# Altium PCB PCB.PcbDoc (part 2 of 2)
Units mm, origin at the board's own origin, x right, y up, seen from the top; angles counter-clockwise.
Board outline 75 x 95 mm, 2 copper layers (Top Layer, Bottom Layer); 84 components, 62 nets, 346 pads, 109 vias.
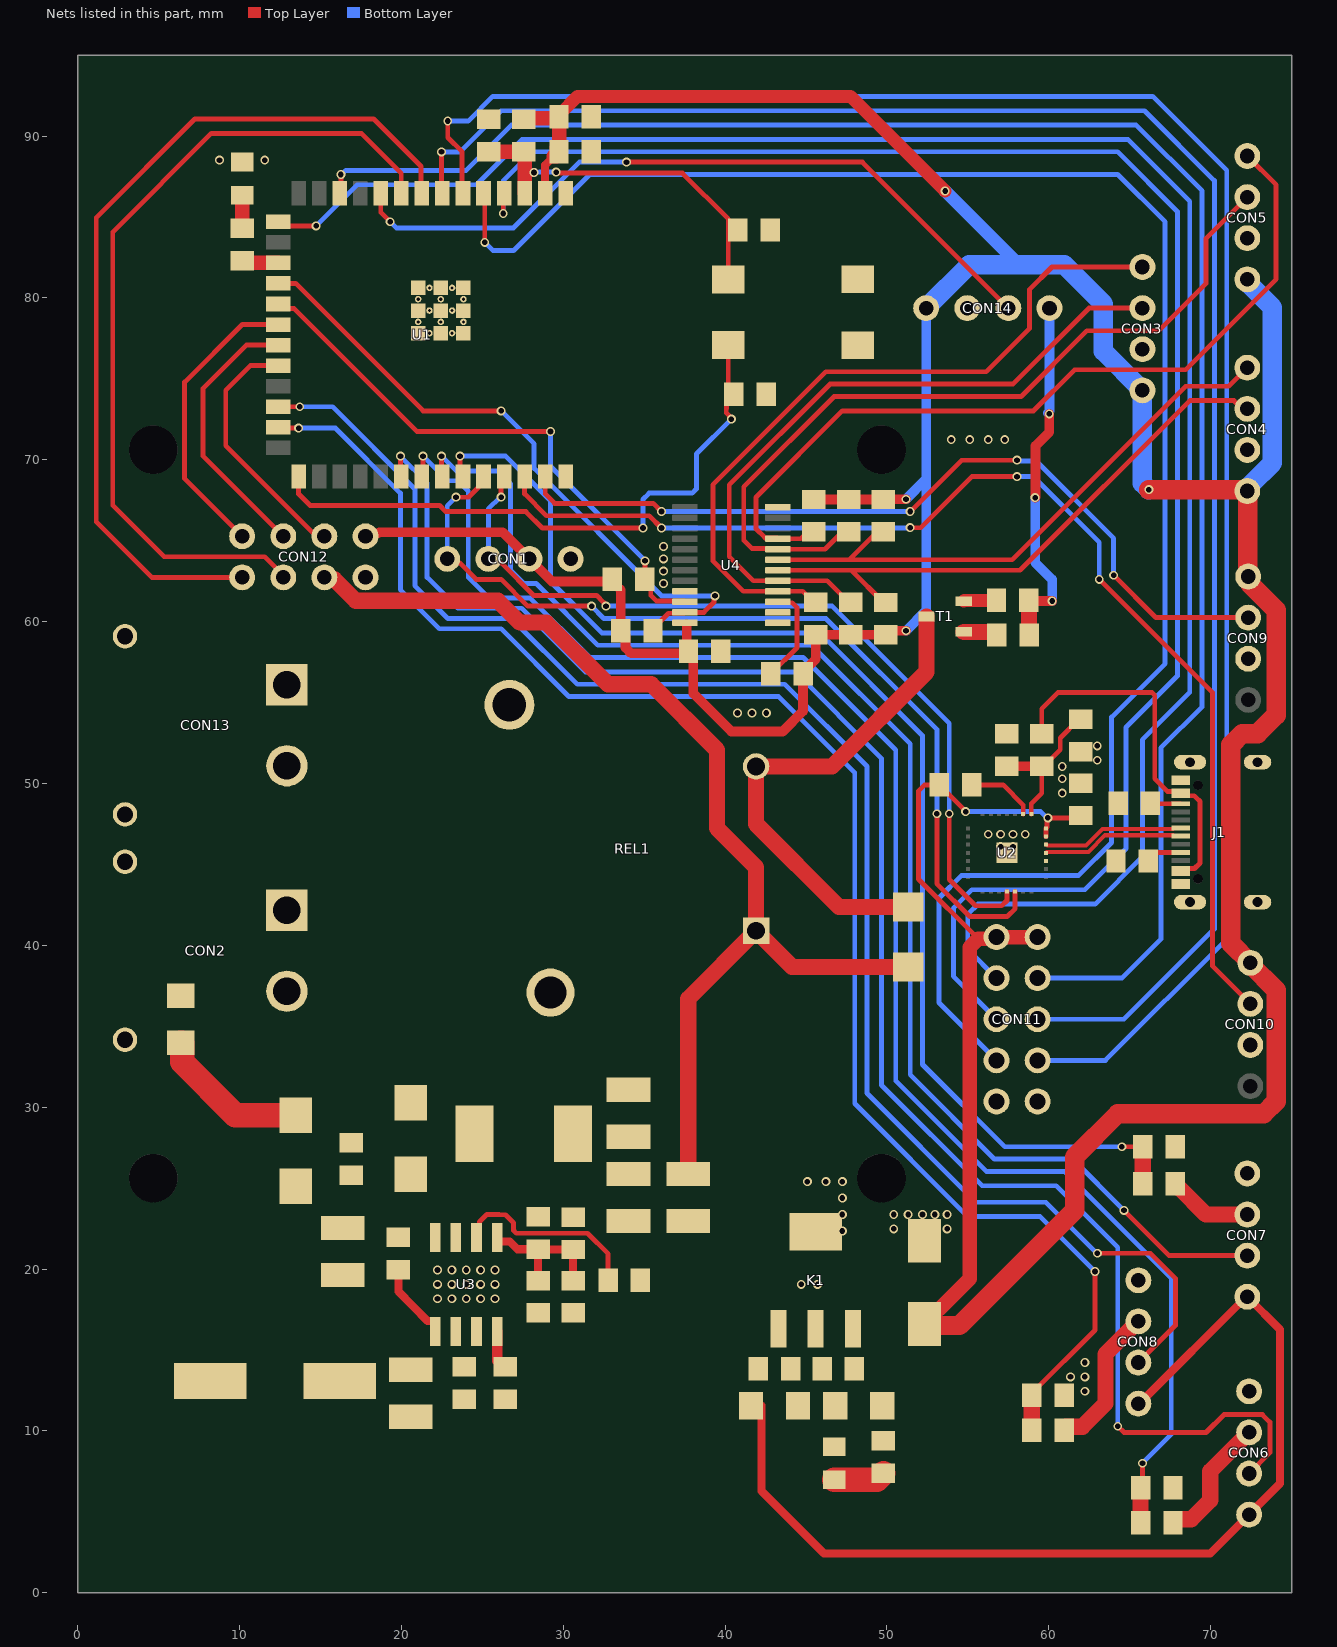
[diagram p2: the nets of this part, all layers, seen from the top]

## Part data
C1 C2 C3 C4 C5 C6 C7 C10 C11 C13 C16 C20 C21 C22: library part CAP_0805, "CAP_0805", note="any manufacturer"
  C1 C3 C5 C10 C11 C22: val=100nF
  C2 C6: val=10uF
  C4 C7: val=1uF
  C13 C16: val="100nF 50V"
  C20 C21: val="100nF 100V"
C8: library part CAP_CAN_D5mm, "SMD Can Capacitor; 5mm Diameter", note="any manufacturer", sample link=https://www.lcsc.com/product-detail/C3357.html?s_z=n_10uF%2520SMD%2520Can%2520Capacitor%2520D5%2520RVT, val=10uf
C9 C12: library part CAP_1206, "CAP_1206", note="any manufacturer", val=1uF
C14: library part CAP_CAN_D10mm, "SMD Can Capacitor; 10mm Diameter", note=Original, sample link=https://www.lcsc.com/product-detail/Aluminum-Electrolytic-span-style-background-color-ff0-Capacitors-span-SMD_ROQANG-RVT2A470M1010_C335988.html, val="47uf 100v"
C15 C17 C18 C19: library part CAP_1210, "CAP_1210", note="any manufacturer"
  C15: val="10uF 100V"
  C17 C18 C19: sample link=https://www.lcsc.com/product-detail/Multilayer-Ceramic-Capacitors-MLCC-SMD-SMT_Samwha-Capacitor-CS3225X7R476K160NRL_C5440143.html, val=CS3225X7R476K160NRL
CON1 CON14: library part CON_1x4_2.54mm_THT, "CON_1x4_2.54mm_THT", note="any manufacturer", val="1x4 2.54mm THT"
CON2 CON13: library part XT30PW-M30.G.Y, "Banana and Tip Connector Adapters RoHS", note="any manufacturer", sample link=https://www.lcsc.com/product-detail/C431092.html, val="Changzhou Amass Elec XT30PW-M30.G.Y"
CON3 CON4 CON5 CON6 CON7 CON8 CON9 CON10: library part CON_1x4_HX2.54mm, "4 Pin HX2.54mm Connector Straight Needle THT", sample link=https://item.taobao.com/item.htm?ali_refid=a3_430582_1006%3A1152101030%3AH%3AfECOJjAJsAVR%2BlV4HdXu0w%3D%3D%3Aff1c71a36a83a51d569faca3e6e2a003&ali_trackid=282_ff1c71a36a83a51d569faca3e6e2a003&id=609608021291&mi_id=0000quewLQZSFLFE1VxBLvft_H3MzoN4Rq4bTtf1JTcVhOg&mm_sceneid=1_0_131154039_0&priceTId=2100c82017726909854371638e0cc7&skuId=4282636056709&spm=a21n57.1.hoverItem.1&utparam=%7B%22aplus_abtest%22%3A%22fb4c3022eff1f28742f3a1e939f5d12a%22%7D&xxc=ad_ztc, sample link 2=https://item.taobao.com/item.htm?abbucket=7&id=597409212146&mi_id=0000Dv6-Sh6HdzdhlDj_dX79iQDtOYoD7Rc0flFh8CmAyxg&ns=1&priceTId=2100c82017726912298546935e0cc7&skuId=4248469041168&spm=a21n57.imgsearch.item.2&utparam=%7B%22aplus_abtest%22%3A%22a76dc8be5391ba4e801be3f8b99bb3a2%22%7D&xxc=taobaoSearch, val="HX2.54mm connector"
CON11: library part CON_IDC_2x5_2.54, "IDC Connector 2x5 2.54mm pitch", note="any manufacturer", sample link=https://www.lcsc.com/product-detail/C5665.html?s_z=n_BOOMELE%28Boom%2520Precision%2520Elec%29%25202.54-2%2a5P, sample link 2=https://item.taobao.com/item.htm?abbucket=6&id=993023982089&mi_id=0000GEDCW2nKoxRS0fGuseLde_Ydw6WZPxIkokftyIfzx-o&ns=1&priceTId=2100c88e17726963391222098e0cf7&skuId=5969453845356&spm=a21n57.1.hoverItem.2&utparam=%7B%22aplus_abtest%22%3A%22b8c570614af0c2c915e1844a14ab4fb4%22%7D&xxc=taobaoSearch, val="BOOMELE(Boom Precision Elec) 2.54-2*5P"
CON12: library part CON_2x4_2.54mm_THT, "CON_2x4_2.54mm_THT", note="any manufacturer", val="2x4 2.54mm THT"
D1 D2: "100V 850mV@5A 5A SMAF Schottky Diodes ROHS", note="any manufacturer", sample link=https://www.lcsc.com/product-detail/Schottky-Diodes_XUMAO-SS510F_C22466253.html, val=SS510F
D3: "Independent 60V 700mV@1A 1A SMA(DO-214AC) Single Diodes RoHS", note="any manufacturer", sample link=https://www.lcsc.com/product-detail/Schottky-Barrier-Diodes-SBD_GOODWORK-SS16_C2943739.html, val=SS16
FUSE1: library part Fuse_1206, "Fuse_1206", note=https://item.taobao.com/item.htm?abbucket=8&id=562837668942&ns=1&spm=a230r.1.14.1.30d440c1oWmyxt, sample link=https://item.taobao.com/item.htm?abbucket=8&id=562837668942&ns=1&spm=a230r.1.14.1.30d440c1oWmyxt, val=4A
G1 G2: "Push Button", note="any manufacturer", sample link=https://www.lcsc.com/product-detail/C42420255.html, val="3x6x4.3MM 2PIN SMT Tactile Tact Push Button button SPST-NO"
J1: library part TYPE-C-31-M-12, "USB-C (USB TYPE-C) Receptacle Connector 16 Position Surface Mount, Right Angle", sample link=https://www.lcsc.com/product-detail/C2765186.html?s_z=n_type%2520C, val="SHOU HAN TYPE-C 16PIN 2MD(073)"
K1: library part MIC39100_SOT223, "LDO;  / 2.25V -> 16V; / 1A Max;  / Fixed Output - 1.8V, 2.5V, 3.3V, 5V", note=Original, sample link=https://www.lcsc.com/product-detail/Linear-Voltage-Regulators-span-style-background-color-ff0-LDO-span_MaxLinear-SPX3940AM3-L-3-3-TR_C48252.html, val=MIC39100-3.3WS
L1: library part IND_FXL06, "Precision Wire Wound Inductor, 2-Leads, Body 4,50x4,00mm, IPC Medium Density", note=original, sample link=https://www.lcsc.com/product-detail/span-style-background-color-ff0-Power-span-Inductors_cjiang-Changjiang-Microelectronics-Tech-FXL0630-8R2-M_C167222.html, val=FXL0630-8R2-M
L2: library part IND_1210_Choke, "Precision Wire Wound Inductor, 2-Leads, Body 4,50x4,00mm, IPC Medium Density", note=Original, sample link=https://www.lcsc.com/product-detail/C2047632.html, val="TDK TFM322512ALMA100MTAA"
R1 R2 R3 R4 R5 R6 R7 R8 R9 R10 R11 R12 R13 R14 R15 R16 R17 R18 R19 R20 R21 R22 R23 R24 R25 R26 R27 R28 R29 R30: library part RES_0805, "RES_0805", note="any manufacturer"
  R1 R8 R9 R13 R20: val=10k
  R3 R23 R24 R25 R26 R27 R28: val=1k
  R5: val=22.1k
  R6: val=47.5k
  R10: val=NC
  R11: val=2k
  R12: val=15k
  R14 R15 R16 R17 R18 R19 R21 R22: val=5k
  R29: val=470
  R30: val=4k7
REL1: library part SLA-05VDC-SL-A, "RELAY POWER SPST-NO 30A 5V /  / Power Relay 1 Form A: 1A (SPST-NO) 5V Coil Through Hole,27.6x32mm", sample link=https://www.lcsc.com/product-detail/C250645.html, val="Songle Relay SLA-05VDC-SL-A"
T1: "N-Channel 30V 5.8A 1.4W Surface Mount SOT-23", note=Original, sample link=https://www.lcsc.com/product-detail/MOSFETs_Diodes-Incorporated-DMN3404L-7_C155257.html, val=DMN3404L-7
U1: library part ESP32-S3-WROOM-1-N16R2, "2.4GHz ESP32-S3 On-board PCB Antenna -103.5dBm SMD,25.5x18mm RF Transceiver Modules and Modems RoHS", sample link=https://www.lcsc.com/product-detail/C2913205.html?s_z=n_esp32-s3, val="ESPRESSIF ESP32-S3-WROOM-1-N16R2"
U2: library part CP2102N-A02-GQFN28R, "USB to UART USB 2.0 QFN-28-EP(5x5) Interface Controllers RoHS", sample link=https://www.lcsc.com/product-detail/C964632.html?s_z=n_CP2102N-A02-GQFN28, val="SILICON LABS CP2102N-A02-GQFN28R"
U3: library part "TI LMR16030SDDAR", "60V 3A Step-Down Converter /  / 2.5MHz Buck Adjustable 1 SO-8-EP Voltage Regulators - DC DC Switching Regulators RoHS", note=original, sample link=https://www.lcsc.com/product-detail/DC-DC-Converters_Texas-Instruments-LMR16030SDDAR_C136648.html, val=LMR16030SDDAR
U4: library part TCA9548APWR, "1.65V~5.5V 400Kbps TSSOP-24 Signal Switches, Multiplexers, Decoders RoHS", sample link=https://www.lcsc.com/product-detail/C130026.html?s_z=n_TCA9548A, val="TI TCA9548APWR"

## Free pads (board coordinates)
  round 3 hole 3: 23(4.663,70.622) 24(4.663,25.622) 25(49.663,70.622) 26(49.663,25.622)

## Via types
v1: diameter 0.55, hole 0.35, Top Layer to Bottom Layer, 109 vias

## Nets (pads, with @x,y where several pads share a name; then routed paths per layer and width w, separated by ;. In a path a pad name is that pad's centre, name@x,y a point inside that pad or via, vN(x,y) a via of type N, cw(c..) or ccw(c..) an arc to the next point about the centre after c; other vN are vias at no path point)
+3.3: C1.2 C2.2 C6.2 C8.1 C11.2 C12.2 C22.1 CON1.2 CON3.1 CON4.1 CON5.1 CON9.1 CON10.1 CON11.1 CON11.6 CON12.7 CON14.4 K1.3 R1.2 R3.2 R8.2 R14.2 R15.2 R16.2 R17.2 R18.2 R19.2 R20.2 R21.2 R22.2 U1.2 U2.6 U2.7 U4.24 | length 284.7
  Top Layer w0.3: v1(54.864,48.26) 54.864,48.276 R3.2@53.229,49.911 52.324,49.911 51.943,49.53 51.943,44.098 55.645,40.396 ; U2.6@59.817,46.72 U2.7@59.817,47.22 59.896,47.299 59.896,47.831 v1(59.944,47.879) 61.833,47.879 C6.2@61.976,48.022
  Top Layer w0.5: U1.2@28.882,86.474 28.882,88.225 C1.2@29.409,88.752
  Top Layer w0.6: CON12.7@17.78,65.278 17.971,65.469 18.569,65.469 18.631,65.532 26.259,65.532 CON1.2@27.91,63.881 29.307,62.484 33.334,62.484 33.334,62.188 33.544,61.978 R22.2@33.544,59.436 33.844,59.136 33.844,58.392 34.195,58.041 C22.1@37.735,58.041 ; U4.24@37.626,59.83 37.626,58.276 38.035,57.866 38.035,55.564 40.386,53.213 43.561,53.213 44.815,54.467 R20.2@44.815,56.769 ; R20.2@44.815,56.894 45.593,57.672 R14.2@45.593,59.198 R15.2@47.752,59.198 47.76,59.19 49.903,59.19 R16.2@49.911,59.182 ; R19.2@45.466,67.548 R17.2@49.784,67.548 49.8,67.564 v1(51.181,67.564) ; R16.2@50.036,59.182 50.29,59.436 v1(51.181,59.436)
  Top Layer w0.8: C2.2@29.734,91.186 29.734,91.311 30.884,92.461 47.747,92.461 v1(53.594,86.614)
  Top Layer w0.9: R1.2@27.559,91.115 C2.2@29.845,91.115 ; C1.2@29.409,88.752 29.584,88.752 29.584,89.302 29.752,89.302 C2.2@29.752,91.022 ; C8.1@53.224,17.502 55.118,19.396 55.118,39.869 55.645,40.396 56.652,40.396 CON11.1@56.769,40.513 CON11.6@59.309,40.513
  Top Layer w1.2: C8.1@52.324,16.602 52.416,16.51 54.483,16.51 61.595,23.622 61.595,26.924 64.262,29.591 73.279,29.591 74.041,30.353 74.041,37.237 72.449,38.829 CON10.1@72.449,38.923 71.247,40.125 71.247,52.383 71.95,53.086 72.898,53.086 74.041,54.229 74.041,60.722 72.399,62.365 72.399,62.712 72.292,62.819 72.292,68.043 CON4.1@72.263,68.072 72.179,68.156 v1(66.182,68.156)
  Bottom Layer w0.3: v1(54.864,48.26) 59.495,48.26 59.876,47.879 v1(59.944,47.879)
  Bottom Layer w0.6: v1(51.181,59.436) 52.421,60.676 52.421,68.804 ; v1(51.181,67.564) 52.421,68.804 ; CON14.4@52.421,79.375 52.421,68.804
  Bottom Layer w0.8: v1(53.594,86.614) 58.166,82.042
  Bottom Layer w1.2: CON14.4@52.421,79.375 55.088,82.042 58.166,82.042 60.96,82.042 63.373,79.629 63.373,76.708 CON3.1@65.786,74.295 65.786,68.551 v1(66.182,68.156) ; CON4.1@72.263,68.072 72.263,68.18 72.463,68.38 72.463,68.461 73.813,69.811 73.813,79.414 72.463,80.764 72.463,80.845 72.263,81.045 CON5.1@72.263,81.153
+5: C9.2 C10.2 C17.2 C18.2 C19.2 CON6.1 CON7.1 CON8.1 CON12.6 D3.1 K1.1 L1.2 R9.2 R10.2 REL1.A1 | length 130.5
  Top Layer w0.5: C9.2@42.238,11.557 42.238,6.276 46.101,2.413 69.977,2.413 72.379,4.815 CON6.1@72.379,4.826 74.295,6.742 74.295,16.256 CON7.1@72.263,18.288 72.2,18.288 65.596,11.684 CON8.1@65.532,11.684
  Top Layer w1: CON12.6@15.24,62.738 15.355,62.623 15.844,62.623 17.179,61.288 25.961,61.288 27.305,59.944 28.956,59.944 32.766,56.134 35.433,56.134 39.497,52.07 39.497,47.244 41.91,44.831 REL1.A1@41.91,40.894 ; C19.2@37.719,25.868 37.719,36.703 REL1.A1@41.91,40.894 ; D3.1@51.308,38.663 44.141,38.663 REL1.A1@41.91,40.894
+12: CON2.P FUSE1.1 REL1.C
D_N: J1.A7 U2.5 | length 8.8
  Top Layer w0.255: U2.5@59.817,46.22 59.866,46.22 59.925,46.161 62.29,46.161 63.317,47.188 67.669,47.188 67.728,47.247 J1.A7@68.148,47.247
D_P: J1.A6 U2.4 | length 8.8
  Top Layer w0.255: U2.4@59.817,45.72 59.876,45.779 62.448,45.779 63.475,46.806 67.669,46.806 67.728,46.747 J1.A6@68.148,46.747
GND: C1.1 C2.1 C3.1 C4.1 C5.1 C6.1 C7.1 C8.2 C9.1 C10.1 C11.1 C12.1 C14.2 C15.1 C16.1 C17.1 C18.1 C19.1 C20.1 C21.1 C22.2 CON1.1 CON2.N CON2.S1 CON2.S2 CON3.2 CON4.2 CON5.2 CON6.4 CON7.4 CON8.4 CON9.3 CON10.3 CON11.5 CON11.10 CON12.8 CON13.N CON13.S1 CON13.S2 CON14.3 D2.2 G1.1 G2.1 J1.A1_B12 J1.B1_A12 J1.S1 J1.S2 J1.S3 J1.S4 K1.2 K1.4 LD1.1 LD2.1 R4.2 R6.2 R7.1 R11.2 R12.2 R13.1 R24.1 R26.1 R28.1 R30.2 T1.2 U1.41_10 U1.41_11 U1.41_12 U1.41_13 U1.41_14 U1.41_15 U1.41_16 U1.41_17 U1.41_18 U1.41_19 U1.41_20 U1.41_21 U1.GND U2.3 U2.29 U3.7 U3.9 U4.1 U4.2 U4.12 U4.21 | length 2.1
  Top Layer w0.8: T1.2@54.744,61.27 54.777,61.303 56.736,61.303 R30.2@56.769,61.336
  other v1: 62.23,12.446 61.341,13.335 62.23,13.335 62.23,14.224 22.225,18.161 23.114,18.161 24.003,18.161 24.892,18.161 25.781,18.161 22.225,19.05 23.114,19.05 24.003,19.05 24.892,19.05 25.781,19.05 44.704,19.05 45.72,19.05 22.225,19.939 23.114,19.939 24.003,19.939 24.892,19.939 25.781,19.939 47.244,22.352 50.419,22.479 53.721,22.479 47.244,23.368 50.419,23.368 51.308,23.368 52.197,23.368 52.959,23.368 53.721,23.368 47.244,24.384 45.085,25.4 46.228,25.4 47.244,25.4 57.023,46.101 57.785,46.101 56.261,46.863 57.023,46.863 57.785,46.863 58.547,46.863 60.833,49.403 60.833,50.292 60.833,51.054 62.992,51.435 62.992,52.324 40.767,54.356 41.656,54.356 42.545,54.356 36.195,62.357 36.195,63.119 36.195,63.881 36.195,64.643 53.975,71.247 55.118,71.247 56.261,71.247 57.277,71.247 8.763,88.519 11.557,88.519
NetC3_2: C3.2 G1.2 U1.27 | length 38.8
  Top Layer w0.3: U1.27@13.642,68.974 13.642,67.892 14.351,67.183 22.352,67.183 22.733,66.802 27.686,66.802 28.702,65.786 v1(34.925,65.786) ; G1.2@40.196,77.089 40.196,74.374 C3.2@40.529,74.041 40.079,73.591 40.079,73.165 40.067,73.152 40.067,72.904 40.386,72.585 v1(40.386,72.517)
  Bottom Layer w0.3: v1(34.925,65.786) 34.925,67.564 35.306,67.945 37.973,67.945 38.227,68.199 38.227,70.358 v1(40.386,72.517)
NetC4_2: C4.2 C5.2 G2.2 R1.1 U1.3 | length 22
  Top Layer w0.3: v1(29.557,87.778) 29.571,87.778 29.632,87.717 37.362,87.717 40.196,84.883 G2.2@40.196,81.153
  Top Layer w0.5: 27.612,87.757 v1(28.194,87.757)
  Top Layer w0.9: C4.2@25.4,89.043 27.176,89.043 27.612,88.607 27.612,87.757 U1.3@27.612,86.474
  Bottom Layer w0.3: v1@28.204,87.767 28.521,87.767 28.532,87.778 v1(29.557,87.778)
  Bottom Layer w0.5: v1(28.194,87.757) v1@28.204,87.767
NetC7_2: C7.2 R5.1 R6.1 U2.8 | length 9.4
  Top Layer w0.3: U2.8@58.917,48.12 58.917,48.757 59.563,49.403 R5.1@59.563,51.07 59.688,51.07 60.706,52.088 60.706,52.814 61.851,53.959 R6.1@61.976,53.959
  Top Layer w0.6: C7.2@57.404,51.07 R5.1@59.563,51.07
NetC13_1: C13.1 U3.1 | length 5
  Top Layer w0.5: C13.1@19.812,19.955 19.812,18.605 20.714,17.703 21.617,16.8 22.023,16.8 22.098,16.725 U3.1@22.098,16.15
NetC13_2: C13.2 D2.1 L1.1 U3.8
NetC14_1: C14.1 C15.2 C21.2 L2.2 U3.2 U3.3
NetC16_2: C16.2 U3.6 | length 12.1
  Top Layer w0.3: U3.6@24.638,21.95 24.813,22.125 24.813,22.908 25.273,23.368 26.022,23.368 26.036,23.355 26.429,23.355 26.924,22.86 26.924,22.385 27.1,22.209 31.498,22.209 32.766,20.941 C16.2@32.766,19.304
NetC20_2: C20.2 D1.1 L2.1
NetCON1_3: CON1.3 U1.37 U2.25 | length 52.8
  Top Layer w0.3: CON1.3@25.37,63.881 25.619,63.632 26.157,63.632 28.17,61.619 32.06,61.619 32.273,61.407 32.273,61.394 32.639,61.028 v1(32.639,60.96) ; v1(26.162,67.691) 26.162,68.794 U1.37@26.342,68.974 ; v1(53.848,48.133) 53.848,44.069 55.47,42.447 57.093,42.447 57.417,42.771 U2.25@57.417,43.32
  Bottom Layer w0.3: CON1.3@25.37,63.881 25.37,66.967 26.094,67.691 v1(26.162,67.691) ; v1(32.639,60.96) 46.609,60.96 53.848,53.721 v1(53.848,48.133)
NetCON1_4: CON1.4 U1.36 U2.26 | length 57.5
  Top Layer w0.3: CON1.4@22.83,63.881 23.079,63.632 23.594,63.632 24.616,62.611 26.162,62.611 27.813,60.96 v1(31.75,60.96) ; v1(23.368,67.691) 24.143,67.691 24.772,68.32 24.772,68.674 U1.36@25.072,68.974 ; v1(53.086,48.133) 53.086,43.815 55.118,41.783 57.426,41.783 57.917,42.274 U2.26@57.917,43.32
  Bottom Layer w0.3: CON1.4@22.83,63.881 22.83,67.153 v1(23.368,67.691) ; v1(31.75,60.96) 32.512,60.198 46.228,60.198 53.086,53.34 v1(53.086,48.133)
NetCON3_3: CON3.3 R15.1 U4.5 | length 43.2
  Top Layer w0.3: R15.1@47.752,61.198 47.627,61.198 46.3,62.525 U4.5@43.256,62.525 41.742,62.525 40.259,64.008 40.259,68.453 46.482,74.676 57.785,74.676 62.484,79.375 CON3.3@65.786,79.375
NetCON3_4: CON3.4 R14.1 U4.4 | length 45.6
  Top Layer w0.3: R14.1@45.593,61.198 45.468,61.198 44.791,61.875 U4.4@43.256,61.875 41.122,61.875 39.243,63.754 39.243,68.453 46.228,75.438 56.134,75.438 58.801,78.105 58.801,80.518 60.198,81.915 CON3.4@65.786,81.915
NetCON4_3: CON4.3 R16.1 U4.6 | length 36.5
  Top Layer w0.3: U4.6@43.256,63.175 47.793,63.175 ; R16.1@49.911,61.182 49.786,61.182 47.793,63.175 ; CON4.3@72.263,73.152 71.945,73.152 71.437,73.66 68.707,73.66 58.222,63.175 47.793,63.175
NetCON4_4: CON4.4 R17.1 U4.7 | length 36.8
  Top Layer w0.3: U4.7@43.256,63.825 47.682,63.825 ; R17.1@49.784,65.802 49.659,65.802 47.682,63.825 ; CON4.4@72.263,75.692 71.12,74.549 68.453,74.549 57.729,63.825 47.682,63.825
NetCON5_3: CON5.3 R18.1 U4.8 | length 50.7
  Top Layer w0.3: R18.1@47.625,65.802 47.5,65.802 46.173,64.475 U4.8@43.256,64.475 43.201,64.53 41.642,64.53 41.148,65.024 41.148,68.326 46.736,73.914 58.293,73.914 62.357,77.978 66.802,77.978 69.723,80.899 69.723,83.693 CON5.3@72.263,86.233
NetCON5_4: CON5.4 R19.1 U4.9 | length 52.1
  Top Layer w0.3: R19.1@45.466,65.802 45.341,65.802 44.664,65.125 U4.9@43.256,65.125 43.201,65.18 42.467,65.18 41.91,65.737 41.91,67.691 47.244,73.025 59.055,73.025 61.595,75.565 68.453,75.565 74.041,81.153 74.041,86.995 CON5.4@72.263,88.773
NetCON6_2: CON6.2 U1.32 | length 106.1
  Top Layer w0.3: v1(19.939,70.231) 19.939,69.027 U1.32@19.992,68.974 ; v1(64.262,10.287) 64.651,9.898 69.715,9.898 70.823,11.006 73.195,11.006 73.66,10.541 73.66,8.647 CON6.2@72.379,7.366
  Bottom Layer w0.3: v1(19.939,70.231) 21.59,68.58 21.59,62.738 23.495,60.833 27.432,60.833 31.369,56.896 44.323,56.896 49.657,51.562 49.657,31.369 55.88,25.146 60.452,25.146 64.262,21.336 v1(64.262,10.287)
NetCON6_3: CON6.3 R23.2 | length 8.1
  Top Layer w1: R23.2@67.675,4.318 67.675,4.443 67.775,4.543 68.805,4.543 69.977,5.715 69.977,7.504 CON6.3@72.379,9.906
NetCON7_2: CON7.2 U1.34 | length 86.6
  Top Layer w0.3: v1(22.479,70.231) 22.479,69.027 U1.34@22.532,68.974 ; v1(64.643,23.622) 67.437,20.828 CON7.2@72.263,20.828
  Bottom Layer w0.3: v1(22.479,70.231) 23.39,69.32 25.93,69.32 26.737,68.513 26.737,63.179 27.559,62.357 28.321,62.357 32.131,58.547 45.339,58.547 51.435,52.451 51.435,32.004 56.642,26.797 61.468,26.797 v1(64.643,23.622)
NetCON7_3: CON7.3 R25.2 | length 5.3
  Top Layer w1: R25.2@67.802,25.273 67.802,25.148 67.902,25.048 68.027,25.048 69.707,23.368 CON7.3@72.263,23.368
NetCON8_2: CON8.2 U1.24 | length 99.2
  Top Layer w0.3: U1.24@12.392,73.279 v1(13.716,73.279) ; v1(63.002,20.976) 66.273,20.976 67.818,19.431 67.818,16.51 CON8.2@65.532,14.224
  Bottom Layer w0.3: v1(13.716,73.279) 15.748,73.279 20.828,68.199 20.828,62.23 22.86,60.198 26.797,60.198 30.861,56.134 43.688,56.134 48.768,51.054 48.768,30.861 55.499,24.13 59.817,24.13 62.992,20.955 63.002,20.965 v1(63.002,20.976)
NetCON8_3: CON8.3 R27.2 | length 9.2
  Top Layer w1: R27.2@60.944,10.033 60.944,10.158 61.044,10.258 62.074,10.258 63.5,11.684 63.5,14.732 CON8.3@65.532,16.764
NetCON9_2: CON9.2 U1.39 | length 51.7
  Top Layer w0.3: U1.39@28.882,68.974 28.882,67.892 29.464,67.31 35.56,67.31 v1(36.068,66.802) ; v1(51.435,66.802) 54.61,69.977 v1(58.039,69.977) ; v1(64.008,62.865) 66.624,60.249 CON9.2@72.322,60.249
  Bottom Layer w0.3: v1(36.068,66.802) v1(51.435,66.802) ; v1(58.039,69.977) 58.087,69.929 59.23,69.929 64.008,65.151 v1(64.008,62.865)
NetCON10_2: CON10.2 U1.38 | length 72.8
  Top Layer w0.3: U1.38@27.612,68.974 27.612,67.892 28.956,66.548 35.306,66.548 v1(36.068,65.786) ; v1(51.432,65.807) 52.091,65.807 55.245,68.961 v1(58.039,68.961) ; v1(63.119,62.611) 70.104,55.626 70.104,38.728 CON10.2@72.449,36.383
  Bottom Layer w0.3: v1(36.068,65.786) 36.079,65.797 51.422,65.797 v1(51.432,65.807) ; v1(58.039,68.961) 59.055,68.961 63.119,64.897 v1(63.119,62.611)
NetCON11_2: CON11.2 U1.15 | length 118.9
  Top Layer w0.3: U1.15@12.392,84.709 12.646,84.455 v1(14.732,84.455)
  Bottom Layer w0.3: v1(14.732,84.455) 17.272,86.995 24.638,86.995 27.432,89.789 64.897,89.789 68.707,85.979 68.707,55.626 65.786,52.705 65.786,45.466 62.865,42.545 55.626,42.545 54.991,41.91 54.991,39.751 CON11.2@56.769,37.973
NetCON11_3: CON11.3 U1.4 | length 108.1
  Top Layer w0.3: v1(26.289,85.217) 26.289,86.421 U1.4@26.342,86.474
  Bottom Layer w0.3: v1(26.289,85.217) 26.289,87.249 28.074,89.034 64.255,89.034 67.945,85.344 67.945,56.642 64.77,53.467 64.77,45.974 62.23,43.434 55.245,43.434 54.102,42.291 54.102,38.1 CON11.3@56.769,35.433
NetCON11_4: CON11.4 U1.5 | length 111.8
  Top Layer w0.3: U1.5@25.072,86.474 25.146,86.4 v1(25.146,83.439)
  Bottom Layer w0.3: v1(25.146,83.439) 25.155,83.439 25.663,82.931 26.924,82.931 31.623,87.63 64.262,87.63 67.183,84.709 67.183,57.404 63.881,54.102 63.881,46.355 61.849,44.323 54.61,44.323 53.213,42.926 53.213,36.449 CON11.4@56.769,32.893
NetCON11_7: CON11.7 U1.12 | length 113.2
  Top Layer w0.3: U1.12@16.182,86.474 16.256,86.548 v1(16.256,87.63)
  Bottom Layer w0.3: v1(16.256,87.63) 16.303,87.63 16.557,87.884 24.003,87.884 26.797,90.678 65.405,90.678 69.469,86.614 69.469,54.737 66.929,52.197 66.929,40.386 64.516,37.973 CON11.7@59.309,37.973
NetCON11_8: CON11.8 U1.7 | length 112.6
  Top Layer w0.3: v1(22.479,89.027) 22.479,86.527 U1.7@22.532,86.474
  Bottom Layer w0.3: v1(22.479,89.027) 23.622,89.027 26.162,91.567 65.913,91.567 70.231,87.249 70.231,41.021 64.643,35.433 CON11.8@59.309,35.433
NetCON11_9: CON11.9 U1.6 | length 117.8
  Top Layer w0.3: v1(22.86,90.932) 22.86,89.916 23.749,89.027 23.749,86.527 U1.6@23.802,86.474
  Bottom Layer w0.3: v1(22.86,90.932) 24.13,90.932 25.654,92.456 66.421,92.456 70.993,87.884 70.993,40.386 63.5,32.893 CON11.9@59.309,32.893
NetCON12_1: CON12.1 U1.20 | length 18.3
  Top Layer w0.3: CON12.1@10.16,65.278 6.604,68.834 6.604,74.803 10.16,78.359 U1.20@12.392,78.359
NetCON12_2: CON12.2 U1.8 | length 54.7
  Top Layer w0.3: CON12.2@10.16,62.738 4.572,62.738 1.143,66.167 1.143,84.963 7.239,91.059 18.288,91.059 21.209,88.138 21.209,86.527 U1.8@21.262,86.474
NetCON12_3: CON12.3 U1.21 | length 16.9
  Top Layer w0.3: U1.21@12.392,77.089 10.414,77.089 7.747,74.422 7.747,70.231 CON12.3@12.7,65.278
NetCON12_4: CON12.4 U1.9 | length 52
  Top Layer w0.3: CON12.4@12.7,62.738 12.7,62.865 11.557,64.008 5.334,64.008 2.159,67.183 2.159,84.074 8.255,90.17 17.526,90.17 19.992,87.704 U1.9@19.992,86.474
NetCON12_5: CON12.5 U1.22 | length 15.7
  Top Layer w0.3: U1.22@12.392,75.819 10.668,75.819 9.144,74.295 9.144,70.866 14.483,65.527 14.991,65.527 CON12.5@15.24,65.278
NetCON13_P: CON13.P REL1.NO
NetCON14_1: CON14.1 R29.1 R30.1 | length 22.6
  Top Layer w0.6: R30.1@58.777,61.328 58.827,61.278 v1(60.208,61.278) ; v1(59.155,67.664) 59.182,67.691 59.182,70.866 60.029,71.713 v1(60.029,72.841)
  Top Layer w1: R30.1@58.777,61.328 58.777,59.185 R29.1@58.785,59.177
  Bottom Layer w0.6: v1(59.155,67.664) 59.155,63.654 60.208,62.601 v1(60.208,61.278) ; v1(60.029,72.841) 59.972,72.898 59.944,72.898 60.041,72.995 CON14.1@60.041,79.375
NetCON14_2: CON14.2 U1.10 | length 45.8
  Top Layer w0.3: U1.10@18.722,86.474 18.722,85.291 v1(19.304,84.709) ; v1@33.918,88.392 48.484,88.392 CON14.2@57.501,79.375
  Bottom Layer w0.3: v1(19.304,84.709) 19.685,84.328 26.924,84.328 30.988,88.392 v1(33.909,88.392)
NetD1_2: D1.2 FUSE1.2 | length 9.7
  Top Layer w1.5: FUSE1.2@6.35,33.983 6.45,33.983 6.45,32.793 9.738,29.505 D1.2@13.462,29.505
NetD3_2: D3.2 REL1.A2 T1.3 | length 31.5
  Top Layer w1: D3.2@51.308,42.363 47.045,42.363 41.91,47.498 REL1.A2@41.91,51.054 46.609,51.054 52.444,56.889 T1.3@52.444,60.32
NetJ1_A4_B9: J1.A4_B9 J1.B4_A9 R5.2 | length 22.8
  Top Layer w0.3: R5.2@59.563,53.07 59.563,54.61 60.579,55.626 66.372,55.626 66.548,55.45 66.548,50.292 67.342,49.498 68.047,49.498 68.298,49.247 68.99,49.247 69.088,49.149 69.342,48.895 69.342,45.085 69.004,44.747 68.298,44.747 J1.A4_B9@68.148,44.597
NetJ1_A5: J1.A5 R4.1 | length 1.9
  Top Layer w0.3: R4.1@66.278,45.72 66.305,45.747 J1.A5@68.148,45.747
NetJ1_B5: J1.B5 R7.2 | length 1.8
  Top Layer w0.3: R7.2@66.299,48.747 J1.B5@68.148,48.747
NetLD1_2: LD1.2 R2.1 | length 2
  Top Layer w0.9: R2.1@10.16,84.312 LD1.2@10.16,86.351
NetLD2_2: LD2.2 R8.1 | length 3.2
  Top Layer w1.5: LD2.2@46.736,6.976 49.378,6.976 R8.1@49.784,7.382
NetR2_2: R2.2 U1.17 | length 2.3
  Top Layer w0.9: R2.2@10.16,82.312 10.303,82.169 U1.17@12.392,82.169
NetR3_1: R3.1 U2.9 | length 4.3
  Top Layer w0.3: R3.1@55.229,49.911 57.175,49.911 58.417,48.669 U2.9@58.417,48.12
NetR9_1: R9.1 R10.1 R11.1 R12.1 U3.5 | length 9
  Top Layer w0.5: U3.5@25.908,21.95 25.908,21.772 25.983,21.697 26.69,21.697 27.162,21.225 R10.1@28.448,21.225 ; R11.1@28.448,19.288 R10.1@28.448,21.225 ; R12.1@30.607,19.288 R9.1@30.607,21.209 30.599,21.217 28.456,21.217 R10.1@28.448,21.225
NetR13_2: R13.2 U3.4 | length 2.5
  Top Layer w0.65: U3.4@25.908,16.15 25.908,14.337 26.291,13.954 R13.2@26.416,13.954
NetR20_1: R20.1 U4.3 | length 6.1
  Top Layer w0.3: R20.1@42.815,56.769 44.45,58.404 44.45,60.867 44.147,61.17 43.311,61.17 U4.3@43.256,61.225
NetR21_1: R21.1 U1.19 U4.22 | length 35.1
  Top Layer w0.3: U1.19@12.392,79.629 12.666,79.355 13.355,79.355 20.955,71.755 v1(29.21,71.755) ; v1(35.052,63.754) 35.052,63.186 35.204,63.034 35.306,63.034 35.407,62.933 35.407,61.621 35.748,61.28 37.461,61.28 U4.22@37.516,61.225
  Bottom Layer w0.3: v1(29.21,71.755) 29.21,69.596 v1(35.052,63.754)
NetR22_1: R22.1 U1.18 U4.23 | length 40.9
  Top Layer w0.3: U1.18@12.392,80.899 13.462,80.899 21.336,73.025 v1(26.162,73.025) ; R22.1@35.544,59.436 35.544,59.561 36.503,60.52 37.461,60.52 U4.23@37.516,60.575 ; U4.23@37.518,60.577 38.686,60.577 39.322,61.213 39.322,61.547 v1(39.37,61.595)
  Bottom Layer w0.3: v1(26.162,73.025) 28.194,70.993 28.194,69.469 36.068,61.595 v1(39.37,61.595)
NetR23_1: R23.1 R24.2 U1.33 | length 99.6
  Top Layer w0.3: U1.33@21.262,68.974 21.336,69.048 v1(21.336,70.231) ; R24.2@65.675,6.477 65.786,6.588 v1(65.786,8.001)
  Top Layer w1: R23.1@65.675,4.318 R24.2@65.675,6.477
  Bottom Layer w0.3: v1(21.336,70.231) 22.86,68.707 23.495,68.707 24.13,68.072 24.13,62.738 25.4,61.468 27.94,61.468 31.623,57.785 44.831,57.785 50.546,52.07 50.546,31.623 56.134,26.035 60.96,26.035 67.564,19.431 67.564,9.779 v1(65.786,8.001)
NetR25_1: R25.1 R26.2 U1.35 | length 78.3
  Top Layer w0.3: v1(23.622,70.231) 23.622,69.154 U1.35@23.802,68.974 ; v1(64.517,27.558) R26.2@65.802,27.559 R26.2@65.802,27.559
  Top Layer w1: R25.1@65.802,25.273 R26.2@65.802,27.559
  Bottom Layer w0.3: v1(23.622,70.231) 26.447,70.231 29.21,67.468 29.21,62.484 32.385,59.309 45.847,59.309 52.197,52.959 52.197,32.639 57.278,27.558 v1(64.517,27.558)
NetR27_1: R27.1 R28.2 U1.25 | length 99
  Top Layer w0.3: U1.25@12.392,72.009 12.444,71.957 v1(13.648,71.957) ; R28.2@58.944,12.192 58.944,12.317 62.859,16.232 v1(62.859,19.843)
  Top Layer w1: R27.1@58.944,10.033 R28.2@58.944,12.192
  Bottom Layer w0.3: v1(13.648,71.957) 15.927,71.957 19.939,67.945 19.939,61.976 19.936,61.973 22.347,59.563 26.162,59.563 30.353,55.372 43.307,55.372 48.006,50.673 48.006,30.226 54.991,23.241 59.462,23.241 v1(62.859,19.843)
NetR29_2: R29.2 T1.1 | length 2.2
  Top Layer w1: T1.1@54.744,59.37 56.685,59.37 56.785,59.27 R29.2@56.785,59.177
pads on no net: CON9.4 CON10.4 J1. J1.A8 J1.B6 J1.B7 J1.B8 U1.11 U1.13 U1.14 U1.16 U1.23 U1.26 U1.28 U1.29 U1.30 U1.31 U2.1 U2.2 U2.10 U2.11 U2.12 U2.13 U2.14 U2.15 U2.16 U2.17 U2.18 U2.19 U2.20 U2.21 U2.22 U2.23 U2.24 U2.27 U2.28 U4.10 U4.11 U4.13 U4.14 U4.15 U4.16 U4.17 U4.18 U4.19 U4.20

## Polygon pours and split planes (outlines as drawn)
+12 on Top Layer "+12_L01_P008" (solid, remove dead copper, pour order 8): 5.207,35.814 9.271,35.814 9.271,39.116 16.129,39.116 16.129,32.639 35.941,32.639 35.941,46.863 11.176,46.863 5.207,40.894
GND on Top Layer "GND_L01_P009" (solid, remove dead copper, pour order 9): 0,0 75,0 75,94.996 0,94.996
NetCON13_P on Top Layer "NETCON13_P_L01_P007" (solid, pour order 7): 9.017,52.959 10.541,52.959 15.377,52.959 15.363,48.133 35.941,48.133 35.941,54.991 32.682,54.991 28.541,59.132 26.974,59.132 25.781,60.325 9.017,60.325
+3.3 on Top Layer "+3.3_L01_P004" (solid, pour order 4): 48.768,12.644 47.125,12.612 47.117,18.034 53.975,18.034 53.975,8.255 48.768,8.255
+5 on Top Layer "+5_L01_P003" (solid, remove dead copper, pour order 3): 28.194,30.607 28.194,24.384 27.432,24.384 27.432,22.479 31.877,22.479 31.877,24.384 40.386,24.384 40.386,10.668 43.815,10.668 43.815,29.464 32.385,29.464 32.258,29.591 32.258,30.607
NetC14_1 on Top Layer "NETC14_1_L01_P002" (solid, pour order 2): 18.161,20.701 13.716,20.701 13.716,11.811 22.479,11.811 22.479,12.954 25.273,12.954 25.273,17.145 22.733,17.145 22.733,14.986 21.082,14.986 21.082,16.383 18.161,16.383
NetC13_2 on Top Layer "NETC13_2_L01_P001" (solid, pour order 1): 22.733,20.955 18.796,20.955 18.796,28.067 22.479,28.067 22.479,30.607 26.543,30.607 26.543,24.257 22.733,24.257
NetC20_2 on Top Layer "NETC20_2_L01_P000" (solid, remove dead copper, pour order 0): 17.907,21.59 17.907,26.416 12.446,26.416 12.446,26.289 12.446,21.59
+12 on Bottom Layer "+12_L02_P005" (solid, remove dead copper, pour order 5): 11.423,46.863 5.081,40.506 5.093,35.814 9.271,35.814 9.271,39.116 16.129,39.116 16.129,32.639 35.941,32.639 35.941,46.863
GND on Bottom Layer "GND_L02_P010" (solid, remove dead copper, pour order 10): 0,0 75,0 75,94.996 0,94.996
NetCON13_P on Bottom Layer "NETCON13_P_L02_P006" (solid, pour order 6): 8.636,52.959 10.541,52.959 15.377,52.959 15.363,48.133 35.941,48.133 35.941,54.991 32.682,54.991 28.541,59.132 26.974,59.132 25.781,60.325 8.636,60.325
no net on Bottom Solder "NONET_L-01_P-001" (solid): 11.557,43.434 29.591,43.434 30.734,42.291 30.734,37.338 cw(c29.066,37.222) 29.08,35.551 cw(c29.24,37.1) 27.686,37.211 27.653,40.044 26.793,40.894 11.557,40.894
no net on Bottom Solder "NONET_L-01_P-001" (solid): 11.557,56.388 27.178,56.388 cw(c27.178,55.372) 28.194,55.372 28.194,54.356 cw(c27.178,54.356) 27.178,53.34 12.827,53.34 11.557,54.61

## Silkscreen, mask and mechanical layers (free items; w line width, h text height)
Top Overlay:
  text "TOF" at 64.389,85.09 h1.52
  text "RST" at 47.879,82.677 h1.52
  text "BOOT" at 47.752,74.168 h1.52
  text "OUT" at 0.381,56.134 h2 r270
  text "CLR_L" at 70.612,55.499 h1.52 r90
  text "IN" at 0.508,41.275 h2 r270
  text "CLR_R" at 70.485,31.242 h1.52 r90
  text "US" at 62.357,22.225 h1.52
Mechanical 13:
  lines w0.064: 4.663,25.622 49.664,25.622 49.664,70.623 4.663,70.623 4.663,25.622
Mechanical 15:
  lines w0.064: 0.001,0 0.001,94.996 75.002,94.996 75.002,0 0.001,0 ; 2.163,23.122 52.164,23.122 52.164,73.123 2.163,73.123 2.163,23.122
  lines w0.254: 66.176,69.446 74.676,69.446

## Text inside footprints (layer, text, board x,y; h text height)
J1: Mechanical 13 "PCB EDGE" at 74.798,52.197 h0.61 r90
U1: Mechanical 13 "ANTENNA" at 34.392,82.224 h1.27 r270